# Allegro board PIC1823-RCSERVO-USB2SERIAL (1).brd
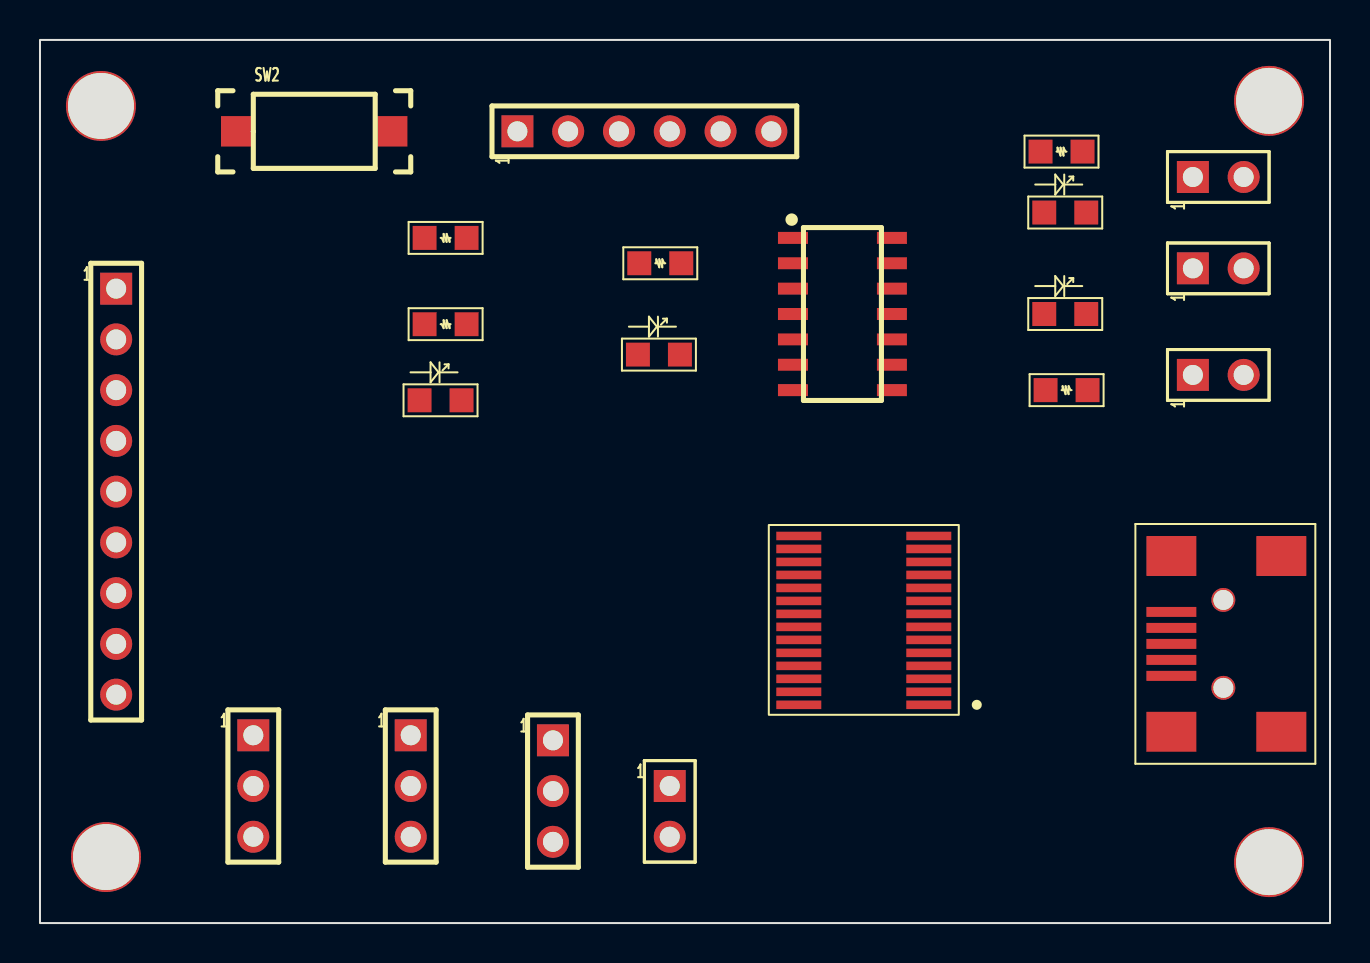
[diagram p0: board, top side]
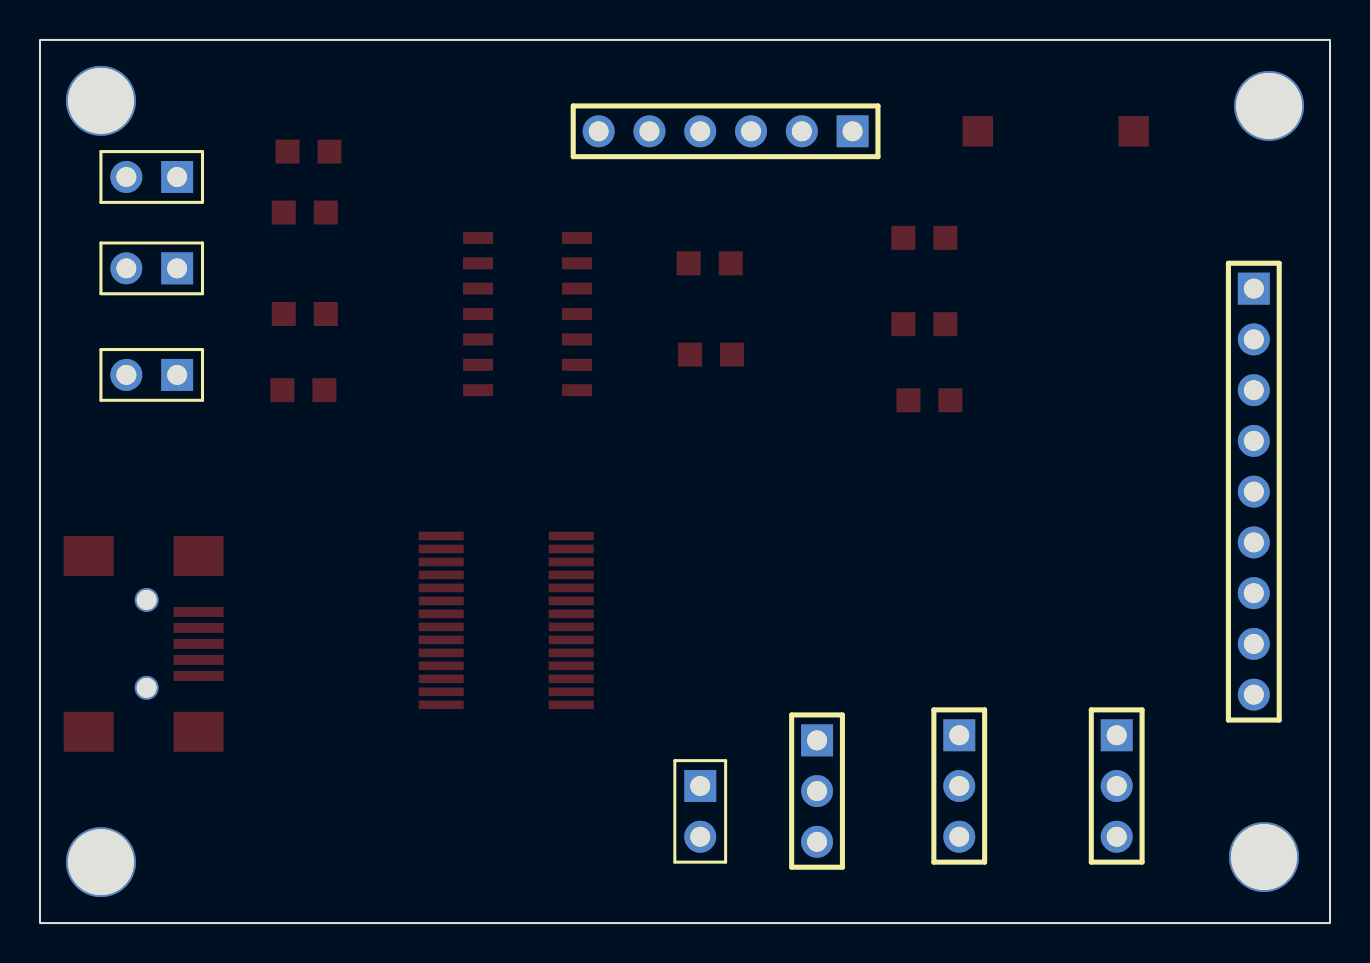
[diagram p1: board, bottom side, seen from below]

Outline 64.52 x 44.2 mm; copper layers: TOP, BOTTOM. Coordinates in mm from the lower left corner of the outline.
Outline path: rectangle 0,0 64.52,44.2

## Placement (name value [footprint] x y rotation side)
D1  5V LED  [LED_SMD_0805]  52.32 30.48 180 top
D2  6V LED  [LED_SMD_0805]  52.32 35.56 180 top
D3  TX LED  [LED_SMD_0805]  32 28.45 180 top
D4  RX LED  [LED_SMD_0805]  21.08 26.16 180 top
J1  6V IN  [J1_2_254]  58.93 37.34 0 top
J2  5V IN  [J1_2_254]  58.93 27.43 0 top
J3  SERVO1  [J1_3_254]  25.65 7.87 270 top
J4  SERVO2  [J1_3_254]  18.54 8.13 270 top
J5  SERVO3  [J1_3_254]  10.67 8.13 270 top
J6  ICSP  [J1_6_254]  25.15 39.62 0 top
J7  GPIO  [J1_9_254]  3.81 30.48 270 top
J8  3V3 OUT  [J1_2_254]  31.5 5.59 270 top
J9  5V_6V_JUMPER  [J1_2_254]  58.93 32.77 0 top
NOREF  -  [unnamed]  3.05 40.89 0 top
NOREF#2  -  [unnamed]  61.47 41.15 0 top
NOREF#3  -  [unnamed]  61.47 3.05 0 top
NOREF#4  -  [unnamed]  3.3 3.3 0 top
R1  1k  [RES_SMD_0805]  50.29 26.67 0 top
R2  1k  [RES_SMD_0805]  50.04 38.61 0 top
R10  10K  [RES_SMD_0805]  21.34 34.29 180 top
R11  330  [RES_SMD_0805]  29.97 33.02 0 top
R12  330  [RES_SMD_0805]  21.34 29.97 180 top
SW2  Reset Button  [SMD_2PIN_BUTTON]  13.72 39.62 0 top
U1  pic16f1823-SOIC14  [SOIC-14_390]  40.13 30.48 0 top
U2  FT232RL  [SSOP-28]  44.45 10.92 180 top
U3  mini USB  [MINI_USB_FP]  59.18 13.97 90 top

## Library data of the parts
D1-D4 = LED
J1 J2 J8 J9 = CON2
J3-J5 = CON3
J6 = CON6
J7 = CON9
R1 R2 R10-R12 = R
SW2 = SW_PB_SPST
U1 = pic16f1823-SOIC14_0
U2 = FT232RL
U3 = mini USB

## Footprints (pads in the part's own frame, mm; a bottom-side part is the same pattern mirrored in y, then rotated)
J1_2_254
  rect 1.6x1.6 hole 1: 1(-1.27,0)
  round 1.6 hole 1: 2(1.27,0)
J1_3_254
  rect 1.6x1.6 hole 1: 1(-1.27,0)
  round 1.6 hole 1: 2(1.27,0) 3(3.81,0)
J1_6_254
  rect 1.6x1.6 hole 1: 1(-1.27,0)
  round 1.6 hole 1: 2(1.27,0) 3(3.81,0) 4(6.35,0) 5(8.89,0) 6(11.43,0)
J1_9_254
  rect 1.6x1.6 hole 1: 1(-1.27,0)
  round 1.6 hole 1: 2(1.27,0) 3(3.81,0) 4(6.35,0) 5(8.89,0) 6(11.43,0) 7(13.97,0) 8(16.51,0) 9(19.05,0)
LED_SMD_0805
  rect 1.2x1.2 smd: 1(0,0) 2(2.1,0)
MINI_USB_FP
  rect 0.5x2.5 smd: 1(-1.6,2.6) 2(-0.8,2.6) 3(0,2.6) 4(0.8,2.6) 5(1.6,2.6)
  rect 2x2.5 smd: 6(4.4,2.6) 7(-4.4,2.6) 8(-4.4,-2.9) 9(4.4,-2.9)
  round 1.2 hole 1: 10(2.2,0) 11(-2.2,0)
RES_SMD_0805
  rect 1.2x1.2 smd: 1(0,0) 2(2.1,0)
SMD_2PIN_BUTTON
  rect 1.524x1.524 smd: 1(-3.9,0) 2(3.9,0)
SOIC-14_390
  rect 1.5x0.6 smd: 1(-2.475,3.81) 2(-2.475,2.54) 3(-2.475,1.27) 4(-2.475,0) 5(-2.475,-1.27) 6(-2.475,-2.54) 7(-2.475,-3.81) 8(2.475,-3.81) 9(2.475,-2.54) 10(2.475,-1.27) 11(2.475,0) 12(2.475,1.27) 13(2.475,2.54) 14(2.475,3.81)
SSOP-28
  rect 2.25x0.43 smd: 1(0,0) 2(0,-0.65) 3(0,-1.3) 4(0,-1.95) 5(0,-2.6) 6(0,-3.25) 7(0,-3.9) 8(0,-4.55) 9(0,-5.2) 10(0,-5.85) 11(0,-6.5) 12(0,-7.15) 13(0,-7.8) 14(0,-8.45) 15(6.5,-8.45) 16(6.5,-7.8) 17(6.5,-7.15) 18(6.5,-6.5) 19(6.5,-5.85) 20(6.5,-5.2) 21(6.5,-4.55) 22(6.5,-3.9) 23(6.5,-3.25) 24(6.5,-2.6) 25(6.5,-1.95) 26(6.5,-1.3) 27(6.5,-0.65) 28(6.5,0)
unnamed
  round 3.5 hole 3.3: (0,0)

## Nets
3V3: J8.1 U2.17(3.3OUT)
5V: J2.1 J6.2 J7.8 J9.1 R1.2 R10.1 R11.2 R12.2 U1.1(VDD) U2.4(VCCIO) U2.20(VCC) U3.1(VCC)
6V: J1.1 J3.2 J4.2 J5.2 J9.2 R2.2
GND: D1.1(CATHODE) D2.1(CATHODE) J1.2 J2.2 J3.3 J4.3 J5.3 J6.3 J7.9 J8.2 SW2.2 U1.14(GND) U2.7(GND2) U2.18(GND1) U2.21(GND) U2.25(AGND) U2.26(TEST) U3.5(GND)
D+: U2.15(USBDP) U3.3(D+)
D-: U2.16(USBDM) U3.2(D-)
MCLR: J6.1 R10.2 SW2.1 U1.4(RA3/S\S\/T1G/VPP/M\C\L\R\)
PGC: J6.5 U1.12(RA1/AN1/CPS1/C12IN0-/VREF+/SRI/)
PGD: J6.4 U1.13(RA0/AN0/CPS0/C1IN+/VREF-/DACOUT)
PIC_RX: U1.5(RC5/P1A/CCP1/RX/DT/MDCIN2) U2.1(TXD)
PIC_TX: U1.6(RC4/C2OUT/SRNQ/P1B/TX/CK/MDOUT) U2.5(RXD)
RA2: J7.1 U1.11(RA2/AN2/CPS2/T0CKI/INT/C1OUT/SR)
RA4: J7.2 U1.3(RA4/AN3/CPS3/OSC2/CLKOUT/T1OSO/)
RA5: J7.3 U1.2(RA5/CLKIN/OSC1/T1OSI/T1CKI)
RC0: J3.1 J7.4 U1.10(RC0/AN4/CPS4/C2IN+/SCL/SCK)
RC1: J4.1 J7.5 U1.9(RC1/AN5/CPS5/C12IN1-/SDA/SDI)
RC2: J5.1 J7.6 U1.8(RC2/AN6/CPS6/C12IN2-/P1D/SDO/MD)
RC3: J7.7 U1.7(RC3/AN7/CPS7/C12IN3-/P1C/S\S\/M)
N004430: D1.2(ANODE) R1.1
N006370: D2.2(ANODE) R2.1
N19819: D3.1(CATHODE) U2.23(CBUS0)
N19831: D4.1(CATHODE) U2.22(CBUS1)
N195260: D3.2(ANODE) R11.1
N196460: D4.2(ANODE) R12.1

Pads without a net: J6 6; U2 2 3 6 8 9 10 11 12 13 14 19 24 27 28; U3 4 6 7 8 9 10 11
